# Altium PCB DriveBoard.PcbDoc
Units mil, origin at the board's own origin, x right, y up, seen from the top; angles counter-clockwise.
Board outline 3346.46 x 3346.46 mil, 2 copper layers (Top Layer, Bottom Layer), stack 65.792 mil thick; 84 components, 55 nets, 212 pads, 599 vias.
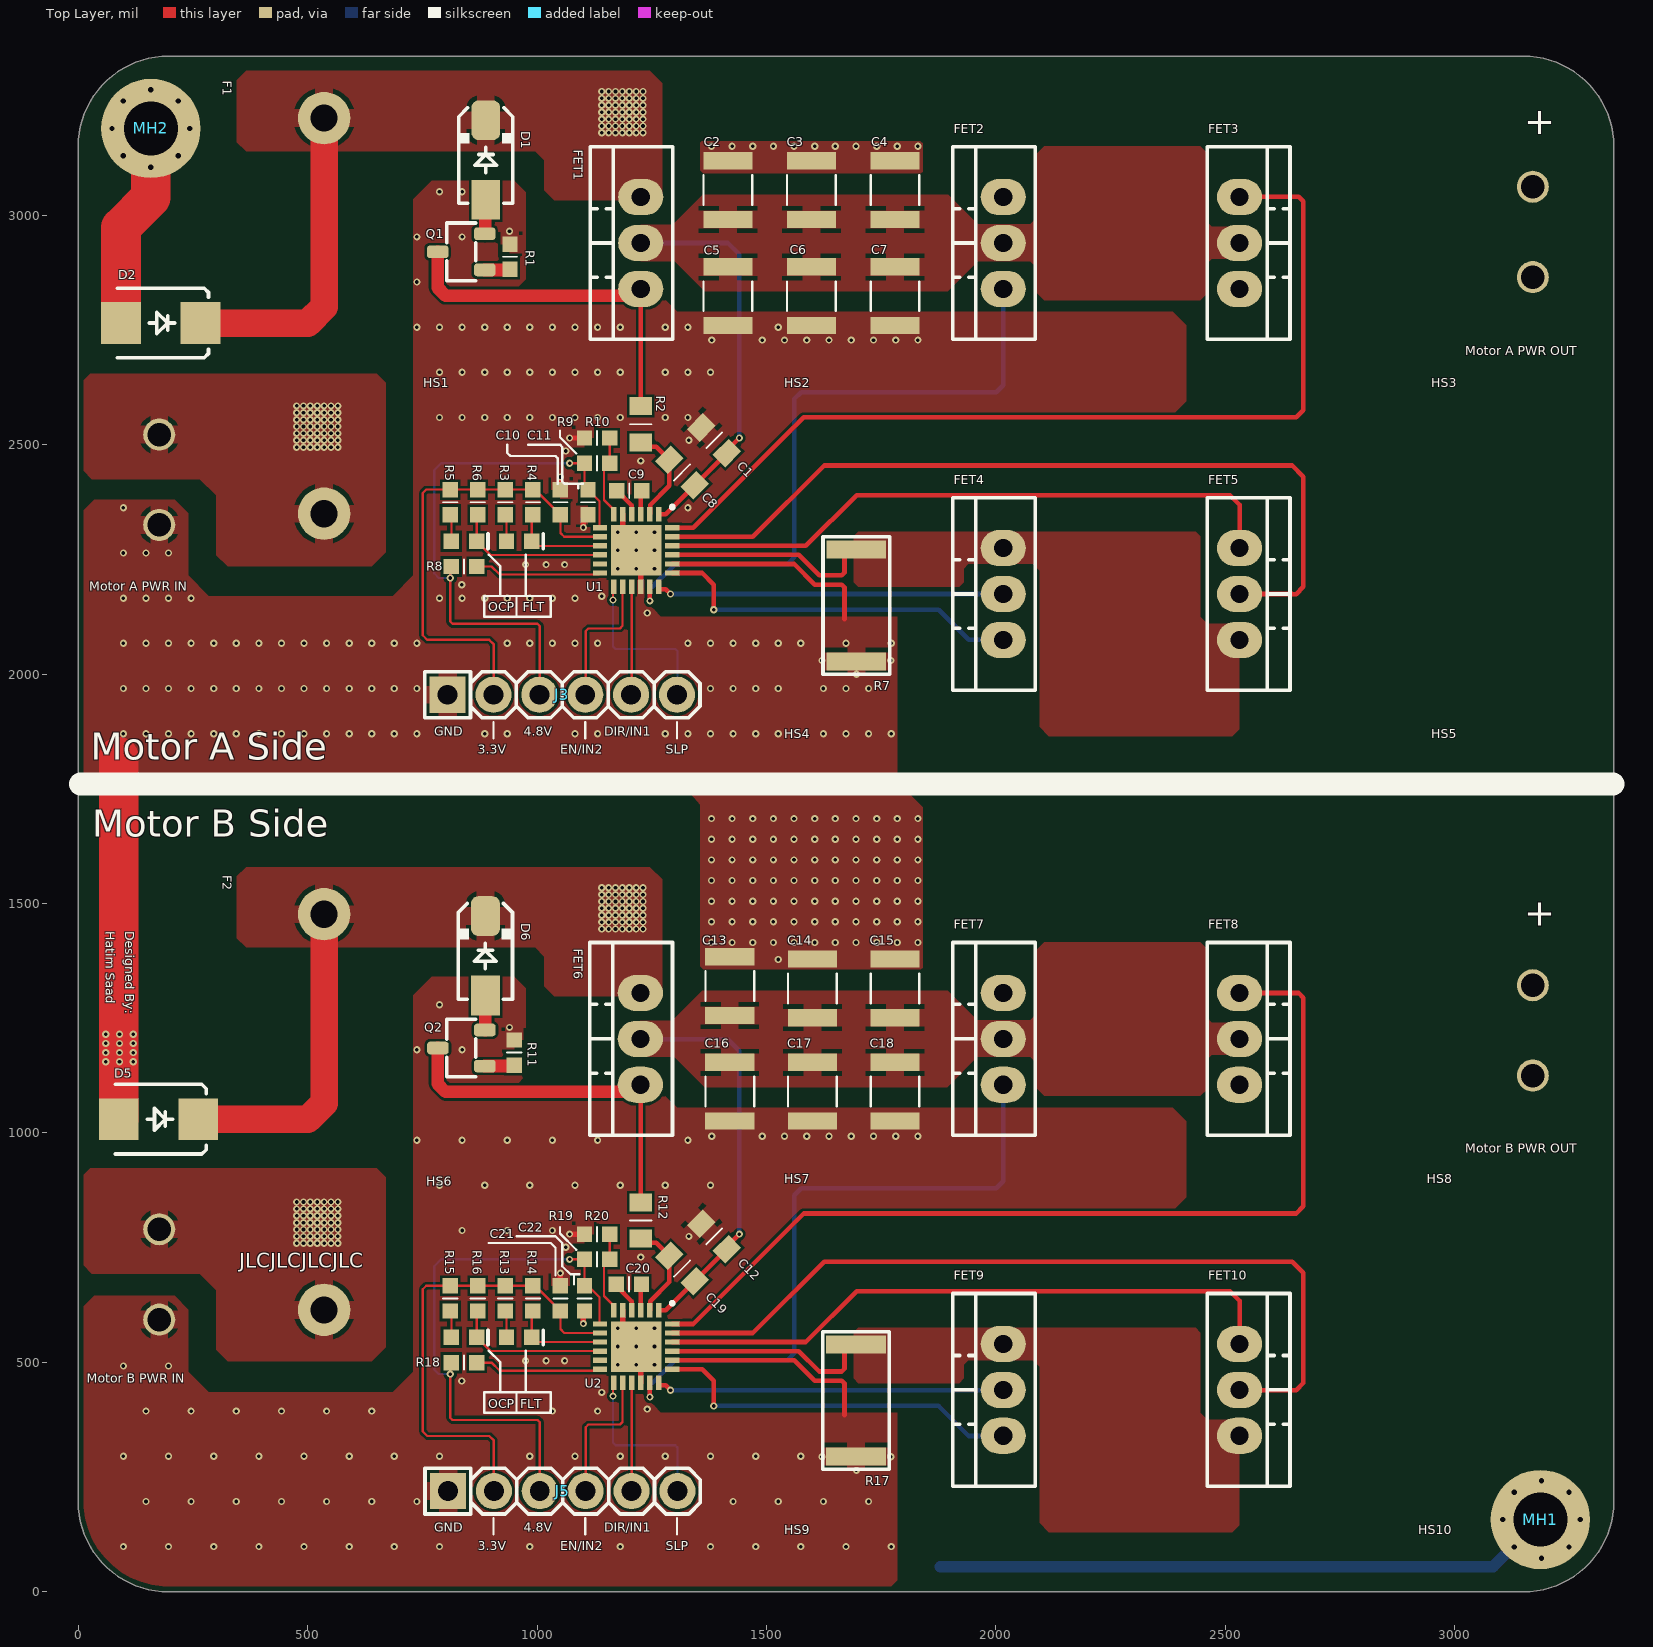
[diagram p0: Top Layer view]
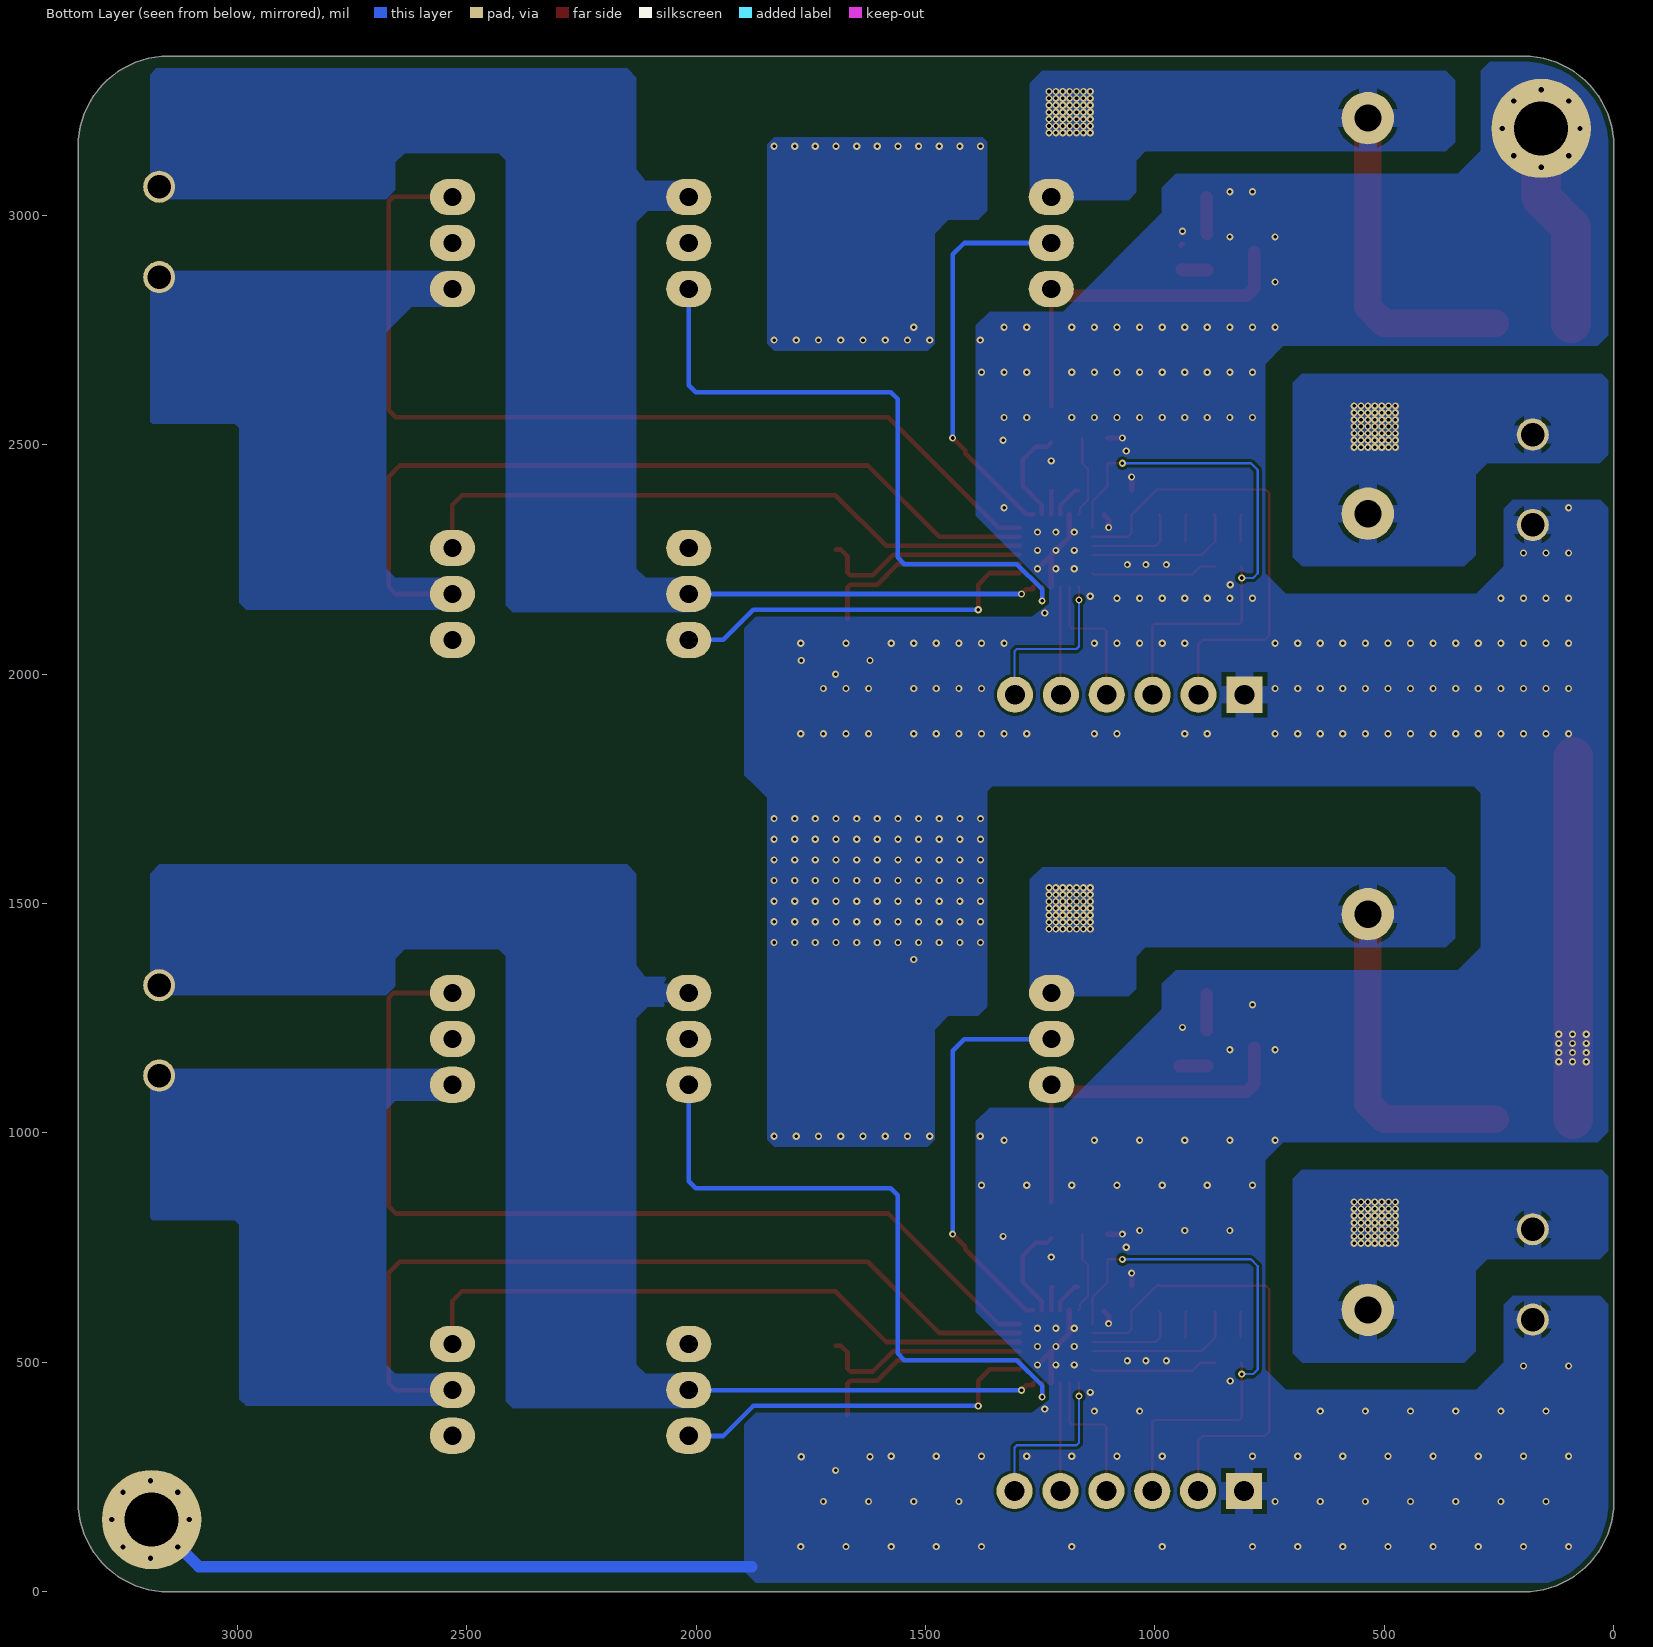
[diagram p1: Bottom Layer view, seen from below]
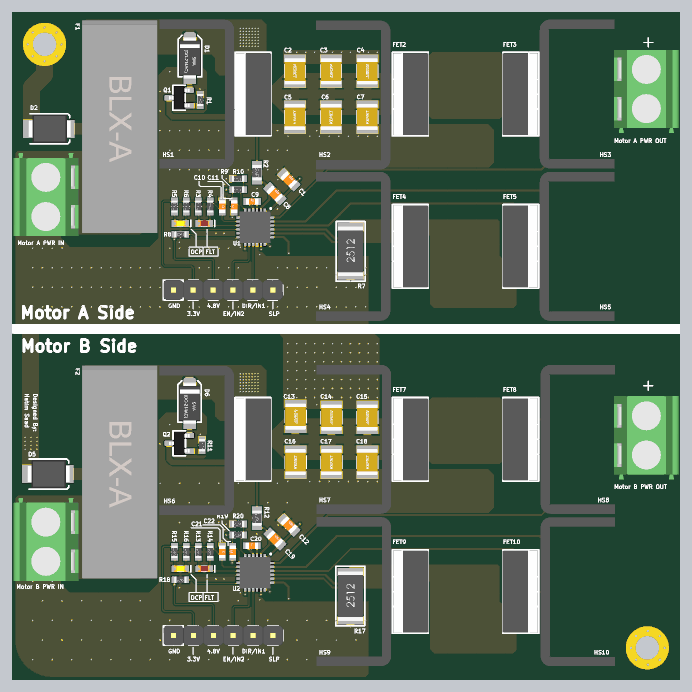
[diagram p2: 3D render of the assembled board from above, using the file's embedded part models]

## Layer stack, top to bottom
Top Solder: solder mask 0.7937, Solder Resist, Dk 3.5
Top Layer: signal copper 1.4
Dielectric 1: dielectric 62.9921, FR-4, Dk 4.8
Bottom Layer: signal copper 1.4
Bottom Solder: solder mask 0.7937, Solder Resist, Dk 3.5

## Board outline
0,196.85 0,3149.61 cw(c196.85,3149.61) 196.85,3346.46 3149.61,3346.46 cw(c3149.61,3149.61) 3346.46,3149.61 3346.46,196.85 cw(c3149.61,196.85) 3149.61,0 196.85,0 cw(c196.85,196.85)

## Design rules (kind name [scope] priority, off if disabled: settings)
BoardOutlineClearance [All] p1: gap=11.81 ignorepadtopadclearanceinfootprint=FALSE
Clearance [All] p1: gap=11.81 ignorepadtopadclearanceinfootprint=TRUE except(5: Arc-Arc Arc-Track Track-Track SMDPad-SMDPad; 5.98: Arc-SMDPad Arc-THPad Track-SMDPad Track-THPad Poly-Region Poly-Text Poly-Hole; 6: Arc-Poly Track-Poly SMDPad-Poly THPad-Poly Via-Fill Via-Poly Fill-Poly Poly-Poly; 10: Arc-Via Track-Via Via-Via; 19.68: THPad-THPad)
DiffPairsRouting [All] p1: maxlimit=10 minlimit=5 mostfreqgap=10 toplayer_minwidth=5 toplayer_maxwidth=15 toplayer_prefwidth=15 bottomlayer_minwidth=5 bottomlayer_maxwidth=15 bottomlayer_prefwidth=15 maxuncoupledlength=500
FabricationTestpoint [All] p1: side=3 testpointundercomponent=TRUE minsize=40 maxsize=100 preferedsize=60 minholesize=0 maxholesize=40 preferedholesize=32 testpointgrid=1 allowsidetop=TRUE allowsidebottom=TRUE usegrid=TRUE gridtolerance=0.01 boardedgeclearance=11.81
Height [All] p1: minheight=0 maxheight=1968.5 prefheight=500
HoleSize [All] p1: absolutevalues=TRUE maxlimit=248.03 minlimit=7.87 maxpercent=80.000 minpercent=20.000
PolygonConnect [All] p1: thpad.connectstyle=Relief thpad.reliefconductorwidth=40 thpad.reliefentries=4 thpad.polygonreliefangle="90 Angle" thpad.airgapwidth=10 smdpad.connectstyle=Relief smdpad.reliefconductorwidth=40 smdpad.reliefentries=4 smdpad.polygonreliefangle="90 Angle" smdpad.airgapwidth=10 via.connectstyle=Direct via.reliefconductorwidth=10 via.reliefentries=4 via.polygonreliefangle="90 Angle" via.airgapwidth=10
RoutingVias [All] p1: holewidth=7.87 width=15.75 viastyle="Through Hole" minholewidth=5.91 minwidth=7.87 maxholewidth=23.62 maxwidth=31.5
SolderMaskExpansion [All] p1: expansion=1.97 istentingtop=FALSE useseparateexpansions=TRUE expansionbottom=1.97 istentingbottom=FALSE
SupplyNets "Schematic Supply Nets_4" [InNet('VM_R_')] p1: voltage=0.000
SupplyNets "Schematic Supply Nets_3" [InNet('VM_L')] p2: voltage=0.000
SupplyNets "Schematic Supply Nets_2" [InNet('VB')] p3: voltage=0.000
SupplyNets "Schematic Supply Nets_1" [InNet('GND')] p4: voltage=0.000
SupplyNets "Schematic Supply Nets" [InNet('VA')] p5: voltage=0.000
UnRoutedNet [All] p1: checkbadconnections=TRUE
Width Width_1 [InNet('VA')] p1: maxlimit=590.55 minlimit=5 preferedwidth=400 minimp=50.000000 maximp=50.000000 favimp=50.000000
Width Width_2 [InNet('VB')] p2: maxlimit=590.55 minlimit=5 preferedwidth=400 minimp=50.000000 maximp=50.000000 favimp=50.000000
Width Width_3 [InNet('Vin_L')] p3: maxlimit=590.55 minlimit=5 preferedwidth=400 minimp=50.000000 maximp=50.000000 favimp=50.000000
Width Width_4 [InNet('Vin_R')] p4: maxlimit=590.55 minlimit=5 preferedwidth=400 minimp=50.000000 maximp=50.000000 favimp=50.000000
Width Width_5 [InNet('VL+')] p5: maxlimit=590.55 minlimit=5 preferedwidth=400 minimp=50.000000 maximp=50.000000 favimp=50.000000
Width Width_6 [InNet('VL-')] p6: maxlimit=590.55 minlimit=5 preferedwidth=400 minimp=50.000000 maximp=50.000000 favimp=50.000000
Width Width_9 [InNet('VR+')] p7: maxlimit=590.55 minlimit=5 preferedwidth=400 minimp=50.000000 maximp=50.000000 favimp=50.000000
Width Width_10 [InNet('VR-')] p8: maxlimit=590.55 minlimit=5 preferedwidth=400 minimp=50.000000 maximp=50.000000 favimp=50.000000
Width [All] p9: maxlimit=590.55 minlimit=5 preferedwidth=10
25 further rules are at their usual default settings.

## Classes and differential pairs
component class Main: 3 C1 C2 C3 C4 C5 C6 C7 C8 C9 C10 C11 C12 C13 C14 C15 C16 C17 C18 C19 C20 C21 C22 D1 D2 D5 D6 F1 F2 FET1 FET2 FET3 FET4 FET5 FET6 FET7 FET8 FET9 FET10 FLT FUSE? HS1 HS3 HS4 HS6 J3 J5 MH1 MH2 "Motor A PWR OUT" "Motor B PWR IN" "Motor B PWR OUT" OCP Q1 Q2 R1 R2 R3 R4 R5 R6 R7 R8 R9 R10 R11 R12 R13 R14 R15 R16 R17 R18 R19 R20 U1 U2

## Components (designator, comment, footprint, x,y, rotation, side; value= is the part's Value field where it differs from the comment)
C1 "0.1UF" "CAP: 0805" 1385.87,2509.45 r315 top
C2 "10UF" "CAP: 1210" 1780,2823.43 r90 top
C3 "10UF" "CAP: 1210" 1415.87,3054.45 r270 top
C4 "10UF" "CAP: 1210" 1597.94,3054.45 r270 top
C5 "10UF" "CAP: 1210" 1415.87,2823.43 r90 top
C6 "10UF" "CAP: 1210" 1597.94,2823.43 r90 top
C7 "10UF" "CAP: 1210" 1780,3054.45 r270 top
C8 "1UF" "CAP: 0805" 1315.87,2439.45 r315 top
C9 "0.1UF" "CAP: 0603" 1200.87,2399.45 r0 top
C10 "1UF" "CAP: 0603" 1050.87,2374.45 r270 top
C11 "1UF" "CAP: 0603" 1110.87,2374.45 r90 top
C12 "0.1UF" "CAP: 0805" 1385.87,774.45 r315 top
C13 "10UF" "CAP: 1210" 1420,1320 r270 top
C14 "10UF" "CAP: 1210" 1600,1315 r270 top
C15 "10UF" "CAP: 1210" 1780,1315 r270 top
C16 "10UF" "CAP: 1210" 1420,1090 r90 top
C17 "10UF" "CAP: 1210" 1600,1090 r90 top
C18 "10UF" "CAP: 1210" 1780,1090 r90 top
C19 "1UF" "CAP: 0805" 1315.87,704.45 r315 top
C20 "0.1UF" "CAP: 0603" 1200,670 r0 top
C21 "1UF" "CAP: 0603" 1050.87,639.45 r270 top
C22 "1UF" "CAP: 0603" 1103.31,639.45 r90 top
D1 "CDBA3100-HF" "DIODE SMA" 885.87,3114.45 r90 top
D2 "SMBJ36A" DO-214AA 180,2765 r180 top
D5 "SMBJ36A" DO-214AA 175,1030 r180 top
D6 "CDBA3100-HF" "DIODE SMA" 885,1380 r90 top
F1 "FUSE 5x20 Holder" "FUSE: 5X20 HOLDER" 535.87,2780.55 r90 top
F2 "FUSE 5x20 Holder" "FUSE: 5x20 Holder" 535.87,1045.55 r90 top
FET1 "STP75NF75" TO220-3 1120.87,2939.45 r90 top
FET2 "STP75NF75" TO220-3 1910.87,2939.45 r90 top
FET3 "STP75NF75" TO220-3 2635.87,2939.45 r270 top
FET4 "STP75NF75" TO220-3 1910.87,2174.45 r90 top
FET5 "STP75NF75" TO220-3 2635.87,2174.45 r270 top
FET6 "STP75NF75" TO220-3 1120,1205 r90 top
FET7 "STP75NF75" TO220-3 1910.87,1205 r90 top
FET8 "STP75NF75" TO220-3 2635.87,1205 r270 top
FET9 "STP75NF75" TO220-3 1910.87,440 r90 top
FET10 "STP75NF75" TO220-3 2635.87,440 r270 top
FLT "RED" "LED: 0603R" 960.87,554.45 r180 top (schematic designator D8)
FLT "RED" "LED: 0603R" 960.87,2289.45 r180 top (schematic designator D4)
HS1 "HSS-B20-NP-06" HSS-B20-NP-06 1110.87,2939.45 r270 top (schematic designator HS3)
HS2 "HSS-B20-NP-06" HSS-B20-NP-06 1895.87,2934.45 r270 top (schematic designator HS9)
HS3 "HSS-B20-NP-06" HSS-B20-NP-06 2645.87,2174.45 r90 top (schematic designator HS4)
HS4 "HSS-B20-NP-06" HSS-B20-NP-06 1895.87,2174.45 r270 top (schematic designator HS10)
HS5 "HSS-B20-NP-06" HSS-B20-NP-06 2645.87,2939.45 r90 top (schematic designator HS1)
HS6 "HSS-B20-NP-06" HSS-B20-NP-06 1110,1200 r270 top
HS7 "HSS-B20-NP-06" HSS-B20-NP-06 1900,1205 r270 top
HS8 "HSS-B20-NP-06" HSS-B20-NP-06 2650,1205 r90 top
HS9 "HSS-B20-NP-06" HSS-B20-NP-06 1900,440 r270 top (schematic designator HS5)
HS10 "HSS-B20-NP-06" HSS-B20-NP-06 2650,439.14 r90 top (schematic designator HS2)
J3 "CONN 6_HF" "CON: PLS-6" 1055,1955 r0 top
J5 "CONN 6_HF" "CON: PLS-6" 1055.87,219.45 r0 top
MH1 "M3" "M3 Mounting Hole"#1 3188.98,157.48 r0 top
MH2 "M3" "M3 Mounting Hole"#2 158.35,3188.98 r0 top
"Motor A PWR IN" "2POS" "CONN2_710002_WRE - duplicate" 176.5,2521.85 r270 top (schematic designator J1)
"Motor A PWR OUT" "2POS" "CONN2_710002_WRE - duplicate" 3170,2865 r90 top (schematic designator J2)
"Motor B PWR IN" "2POS" "CONN2_710002_WRE - duplicate" 176.5,790 r270 top (schematic designator J4)
"Motor B PWR OUT" "2POS" "CONN2_710002_WRE - duplicate" 3170,1125 r90 top (schematic designator J6)
OCP "YELLOW" "LED: 0603Y" 840.87,554.45 r180 top (schematic designator D7)
OCP "YELLOW" "LED: 0603Y" 840.87,2289.45 r180 top (schematic designator D3)
Q1 "BC846B-7-F" SOT23_3 834.69,2920.08 r180 top
Q2 "BC846B-7-F" SOT23_3 835,1185 r180 top
R1 "43K" "RES: 0603" 940.87,2909.45 r270 top
R2 "10K" "RES: 0805" 1225.87,2544.45 r90 top
R3 "10K" "RES: 0603" 930.87,2374.45 r90 top
R4 "10K" "RES: 0603" 990.87,2374.45 r90 top
R5 "10K" "RES: 0603" 810.87,2374.45 r90 top
R6 "10K" "RES: 0603" 870.87,2374.45 r90 top
R7 "15mOhm" "RES: 2512" 1695.87,2149.45 r90 top
R8 "68K" "RES: 0603" 840.87,2234.45 r180 top
R9 "2K" "RES: 0603" 1130.87,2459.45 r180 top
R10 "3.3K" "RES: 0603" 1130.87,2514.45 r180 top
R11 "43K" "RES: 0603" 950,1175 r270 top
R12 "10K" "RES: 0805" 1225.87,809.45 r90 top
R13 "10K" "RES: 0603" 930.87,639.45 r90 top
R14 "10K" "RES: 0603" 990.87,639.45 r90 top
R15 "10K" "RES: 0603" 810.87,639.45 r90 top
R16 "10K" "RES: 0603" 870.87,639.45 r90 top
R17 "15mOhm" "RES: 2512" 1695,417.05 r90 top
R18 "68K" "RES: 0603" 840.87,499.45 r180 top
R19 "2K" "RES: 0603" 1130.87,724.45 r180 top
R20 "3.3K" "RES: 0603" 1130.87,779.45 r180 top
U1 "DRV8701PRGER" VQFN-24 1215.87,2269.45 r270 top
U2 "DRV8701PRGER" VQFN-24 1215.87,534.45 r270 top

## Footprints (in the part's own frame and the unit in brackets; to place one, negate y for a bottom-side part, rotate by r counter-clockwise, add the part's x,y. Pads: shape width x height; smd on the part's side, far side on the other; paste and mask are expansions set on the pad)
"CAP: 0603" [mm]
  rect 0.85x0.85 smd: 1(-0.7,0) 2(0.7,0)
  silkscreen extent 0,-0.4 0,0.4, body extent -0.8,-0.4 0.8,0.4, height 0.3
"CAP: 0805" [mm]
  rect 1x1.25 smd: 1(-1,0) 2(1,0)
  silkscreen extent 0,-0.62 0,0.63, body extent -1,-0.62 1,0.63, height 0.78
"CAP: 1210" [mm]
  rect 0.96x2.72 smd: 1(-1.625,0) 2(1.625,0)
  silkscreen extent -0.82,-1.35 0.82,1.35, body extent -1.67,-1.35 1.73,1.35, height 2.09
"CON: PLS-6" [mm]
  rect 2x2 hole 1.1: 1(-6.35,0)
  round 2 hole 1.1: 2(-3.81,0) 3(-1.27,0) 4(1.27,0) 5(3.81,0) 6(6.35,0)
  silkscreen extent -7.62,-1.27 7.62,1.27, body extent -7.62,-1.27 7.62,1.27, height 8.54
"CONN2_710002_WRE - duplicate" [mil]
  round 70 hole 51 paste-99999 mask+0: 1(0,0) 2(196.85,0)
  body extent -121,-175 296,152, height 394
"DIODE SMA" [mm]
  rect 2.2x1.6 smd: 1(-2.05,-0.06)
  rrect50% 2.2x1.6 smd: 2(2.35,-0.06)
  silkscreen extent -2.25,-1.56 3.05,1.44, body extent -2.6,-1.46 2.9,1.34, height 2.6
DO-214AA [mm]
  rect 2.2x2.3 smd: 1(2.2,0) 2(-2.2,0)
  silkscreen extent -2.64,-1.93 2.4,1.93, body extent -2.8,-1.81 2.6,1.81, height 2.66
"FUSE: 5X20 HOLDER" [mm]
  round 2.9 hole 1.5: 1(-10.95,0) 2(10.95,0)
  body extent -13.7,-4.8 13.48,4.8, height 13.07
"FUSE: 5x20 Holder" [mm]
  round 2.9 hole 1.5: 1(-10.95,0) 2(10.95,0)
  body extent -13.7,-4.8 13.48,4.8, height 13.07
HSS-B20-NP-06 [mil] "Heat Sinks 19 x 19 x 9.52mm TO-220 bolt on"
  body extent -374,-375 374,0, height 870
"LED: 0603R" [mm]
  rect 0.85x0.85 smd: 1(-0.7,0) 2(0.7,0)
  silkscreen extent -1.33,-0.4 -1.33,0.4, body extent -0.8,-0.4 0.8,0.4, height 0.6
"LED: 0603Y" [mm]
  rect 0.85x0.85 smd: 1(-0.7,0) 2(0.7,0)
  silkscreen extent -1.33,-0.4 -1.33,0.4, body extent -0.8,-0.4 0.8,0.4, height 0.6
"M3 Mounting Hole"#1 [mm]
  round 5.5 hole 3 mask+0: 1(-0.064,0)
"M3 Mounting Hole"#2 [mm]
  round 5.5 hole 3 paste-2539.97 mask+0: 1(0,0)
"RES: 0603" [mm]
  rect 0.85x0.85 smd: 1(-0.7,0) 2(0.7,0)
  silkscreen extent 0,-0.4 0,0.4, body extent -0.8,-0.4 0.8,0.4, height 0.44
"RES: 0805" [mm]
  rect 1x1.25 smd: 1(-1,0) 2(1,0)
  silkscreen extent 0,-0.6 0,0.6, body extent -1,-0.6 1,0.6, height 0.44
"RES: 2512" [mm]
  rect 1x3.3 smd: 1(-3.1,0) 2(3.1,0)
  silkscreen extent -3.8,-1.85 3.8,1.85, body extent -3.18,-1.6 3.17,1.6, height 0.52
SOT23_3 [mm]
  rrect50% 1.2x0.7 smd mask+0.1: 1(-1.3,1) 2(-1.3,-1) 3(1.3,0)
  silkscreen extent -0.8,-1.6 0.8,1.6, body extent -1.32,-1.5 1.32,1.5, height 1.08
TO220-3 [mm] "TO-220 3 LEAD, TO-262, pitch: 2.54mm  10x4.5mm"
  oval 2x2.5 hole 1: 1(-2.54,-2.667) 2(0,-2.667) 3(2.54,-2.667)
  silkscreen extent -5.33,-4.44 5.33,0.13, body extent -5.2,-4.5 5.2,0, height 19
VQFN-24 [mm]
  rect 0.8x0.3 smd mask+0.076: 1(-2,1.25) 2(-2,0.75) 3(-2,0.25) 4(-2,-0.25) 5(-2,-0.75) 6(-2,-1.25) 13(2,-1.25) 14(2,-0.75) 15(2,-0.25) 16(2,0.25) 17(2,0.75) 18(2,1.25)
  rect 0.3x0.8 smd mask+0.076: 7(-1.25,-2) 8(-0.75,-2) 9(-0.25,-2) 10(0.25,-2) 11(0.75,-2) 12(1.25,-2) 19(1.25,2) 20(0.75,2) 21(0.25,2) 22(-0.25,2) 23(-0.75,2) 24(-1.25,2)
  rect 2.8x2.8 smd mask+0.076: 25(0,0)
  silkscreen extent -2.49,1.91 -2.31,2.09, body extent -2.05,-2.05 2.05,2.05, height 1

## Part data
C1 C8 C12 C19: library part "CAP 0805", "CAP SMD 0805"
C2 C3 C4 C5 C6 C7 C13 C14 C15 C16 C17 C18: library part "CAP 1210", "CAP SMD 1210"
C9 C10 C11 C20 C21 C22: library part "CAP 0603", "CAP SMD 0603"
D1 D6: library part 641-1747-1-ND, "Diode Schottky 100V 3A (DC) Surface Mount DO-214AC (SMA)", Supplier Part Number 1=750-CDBA3100-HF, Supplier 1=Mouser
D2 D5: "ESD Protection Diodes / TVS Diodes 36volts 5uA 10.3 Amps Uni-Dir", Supplier Part Number 1=652-SMBJ36A, Supplier 1=Mouser
F1 F2: "FUSE: 5x20 Holder"
FET1 FET2 FET3 FET4 FET5 FET6 FET7 FET8 FET9 FET10: "MOSFETs N-Ch 75 Volt 80 Amp", Supplier Part Number 1=511-STP75NF75, Supplier 1=Mouser
FLT FLT: library part "LED RED 0603", "LED RED CLEAR 0603 SMD"
HS1 HS2 HS3 HS4 HS5 HS6 HS7 HS8 HS9 HS10: "Heat Sinks 19 x 19 x 9.52mm TO-220 bolt on", Supplier Part Number 1=490-HSS-B20-NP-06, Supplier 1=Mouser
MH1 MH2: library part "Mounting Hole M3", "Mounting Hole M3 Screw"
"Motor A PWR IN" "Motor A PWR OUT" "Motor B PWR IN" "Motor B PWR OUT": library part 691213710002, "TERM BLK 2POS SIDE ENTRY 5MM PCB", Mfr_Name="Wurth Electronics", Supplier Part Number 1=710-691213710002, RefDes=RefDes, Supplier 1=Mouser, Type=Type
OCP OCP: library part "LED YELLOW 0603", "LED YELLOW CLEAR 0603 SMD"
Q1 Q2: library part BC846B-FDICT-ND, "Bipolar (BJT) Transistor NPN 65V 100mA 300MHz 300mW Surface Mount SOT-23-3", Supplier Part Number 1=621-BC846B-7-F, Supplier 1=Mouser
R1 R3 R4 R5 R6 R8 R9 R10 R11 R13 R14 R15 R16 R18 R19 R20: library part "RES 0603", "RES SMD 0603"
R2 R12: library part "RES 0805", "RES SMD 0805"
R7 R17: library part CSNL2512FT15L0, "Current Sense Resistors - SMD 0.015Ohms 2512 3W 50ppm 1% Metal Plate", Supplier Part Number 1=708-CSNL2512FT15L0, Supplier 1=Mouser
U1 U2: "Motor/Motion/Ignition Controllers & Drivers 47-V H-bridge smart gate driver 24-VQFN", Supplier Part Number 1=595-DRV8701PRGER, Supplier 1=Mouser

## Via types
v1: diameter 15.75, hole 7.87, Top Layer to Bottom Layer, tented both sides, 583 vias
v2: diameter 23.62, hole 11.81, Top Layer to Bottom Layer, 16 vias

## Nets (pads, with @x,y where several pads share a name; then routed paths per layer and width w, separated by ;. In a path a pad name is that pad's centre, name@x,y a point inside that pad or via, vN(x,y) a via of type N, cw(c..) or ccw(c..) an arc to the next point about the centre after c; other vN are vias at no path point)
AVDD_L: C11.2 J3.3 R8.2 R9.2 U1.7 | length 1222.7
  Top Layer w5: R8.2 810.87,2232.01 810.87,2114.45 815.87,2109.45 1000.87,2109.45 1005.87,2104.45 J3.3@1005.87,1954.45 ; v1(1070.87,2459.45) R9.2 1103.31,2409.57 C11.2 1136.09,2376.79 1136.09,2319.7 U1.7
  Bottom Layer w5: v1(810.87,2209.45) 785.87,2209.45 775.87,2219.45 775.87,2444.45 790.87,2459.45 v1(1070.87,2459.45)
AVDD_R: C22.2 J5.3 R18.2 R19.2 U2.7 | length 1222.7
  Top Layer w5: R18.2 810.87,497.01 810.87,379.45 815.87,374.45 1000.87,374.45 1005.87,369.45 J5.3 ; v1(1070.87,724.45) R19.2 1103.31,674.57 1110.87,667.01 1136.09,641.79 1136.09,584.7 U2.7
  Bottom Layer w5: v1(810.87,474.45) 785.87,474.45 775.87,484.45 775.87,709.45 790.87,724.45 v1(1070.87,724.45)
CPH_L: C9.2 U1.3 | length 52.2
  Top Layer w10: C9.2@1223.43,2399.45 1225.72,2397.17 U1.3
CPH_R: C20.2 U2.3 | length 52.2
  Top Layer w10: C20.2@1223.43,664.45 1225.72,662.17 U2.3
CPL_L: C9.1 U1.4 | length 70.5
  Top Layer w10: C9.1@1168.31,2399.45 1174.43,2399.45 1205.87,2368.01 1205.87,2348.35 U1.4
CPL_R: C20.1 U2.4 | length 70.5
  Top Layer w10: C20.1@1168.31,664.45 1174.43,664.45 1205.87,633.01 1205.87,613.35 U2.4
DIR_L/IN1_L: J3.5 U1.15 | length 236.3
  Top Layer w5: J3.5@1205.87,1954.45 1206.03,1954.61 U1.15
DIR_R/IN1_R: J5.5 U2.15 | length 236.3
  Top Layer w5: J5.5 1206.03,219.61 U2.15
DVDD_L: C10.2 J3.2 R3.2 R4.2 R5.2 R6.2 U1.8 | length 1037
  Top Layer w5: J3.2@905.87,1954.45 905.87,2064.45 895.87,2074.45 760.87,2074.45 750.87,2084.45 750.87,2394.45 758.43,2402.01 R5.2 R6.2 R3.2 R4.2 ; R4.2@993.31,2404.45 C10.2 1050.87,2307.56 1059.46,2298.98 U1.8
DVDD_R: C21.2 J5.2 R13.2 R14.2 R15.2 R16.2 U2.8 | length 1037
  Top Layer w5: J5.2 905.87,329.45 895.87,339.45 760.87,339.45 750.87,349.45 750.87,659.45 758.43,667.01 R15.2 R16.2 R13.2 R14.2 ; R14.2@993.31,669.45 C21.2 1050.87,572.56 1059.46,563.98 U2.8
EN_L/IN2_L: J3.4 U1.14 | length 309.9
  Top Layer w5: J3.4@1105.87,1954.45 1105.87,2093.59 1111.73,2099.45 1180.49,2099.45 1186.35,2105.31 U1.14
EN_R/IN2_R: J5.4 U2.14 | length 309.9
  Top Layer w5: J5.4 1105.87,358.59 1111.73,364.45 1180.49,364.45 1186.35,370.31 U2.14
FLT_L: FLT.1@988.43,2289.45 R4.1 U1.9 | length 211.4
  Top Layer w5: R4.1 988.43,2344.45 988.43,2289.45 998.59,2279.29 U1.9
FLT_R: FLT.1@988.43,554.45 R14.1 U2.9 | length 211.4
  Top Layer w5: R14.1 988.43,609.45 988.43,554.45 998.59,544.29 U2.9
GH1_L: FET2.1 U1.17 | length 1422.9
  Top Layer w10: U1.17 1245.4,2159.92 v1(1245.87,2159.45)
  Bottom Layer w10: v1(1245.87,2159.45) 1245.87,2184.45 1300.87,2239.45 1545.87,2239.45 1560.87,2254.45 1560.87,2599.45 1575.87,2614.45 2000.87,2614.45 2015.87,2629.45 FET2.1
GH1_R: FET7.1 U2.17 | length 1422.9
  Top Layer w10: U2.17 1245.4,424.92 v1(1245.87,424.45)
  Bottom Layer w10: v1(1245.87,424.45) 1245.87,449.45 1300.87,504.45 1545.87,504.45 1560.87,519.45 1560.87,864.45 1575.87,879.45 2000.87,879.45 2015.87,894.45 FET7.1@2015.87,1104.45
GH2_L: FET3.1 U1.24 | length 2080.1
  Top Layer w10: U1.24 1340.09,2318.66 1580.87,2559.45 2654.45,2559.45 2670,2575 2670,3030 2660,3040 2531.43,3040 FET3.1
GH2_R: FET8.1 U2.24 | length 2080.1
  Top Layer w10: U2.24 1340.09,583.66 1580.87,824.45 2654.45,824.45 2670,840 2670,1295 2660,1305 2531.43,1305 FET8.1@2530.87,1304.45
GL1_L: FET4.1 U1.19 | length 813.9
  Top Layer w10: U1.19 1359.76,2220.24 1385,2195 v1(1385,2140)
  Bottom Layer w10: v1(1385,2140) 1875,2140 1940.55,2074.45 FET4.1
GL1_R: FET9.1 U2.19 | length 813.9
  Top Layer w10: U2.19 1359.76,485.24 1385,460 v1(1385,405)
  Bottom Layer w10: v1(1385,405) 1875,405 1940.55,339.45 FET9.1@2015.87,339.45
GL2_L: FET5.1 U1.22 | length 1385.4
  Top Layer w10: U1.22 1585.72,2279.29 1696.43,2390 2510,2390 2530.87,2369.13 FET5.1
GL2_R: FET10.1 U2.22 | length 1385.4
  Top Layer w10: U2.22 1585.72,544.29 1696.43,655 2510,655 2530.87,634.13 FET10.1@2530.87,539.45
GND: "Motor A PWR IN.2" "Motor B PWR IN.2" C1.1 C2.1 C3.1 C4.1 C5.1 C6.1 C7.1 C10.1 C11.1 C12.1 C13.1 C14.1 C15.1 C16.1 C17.1 C18.1 C21.1 C22.1 D2.1 D5.1 J3.1 J5.1 MH1.1 MH2.1 R1.1 R7.1 R10.2 R11.1 R17.1 R20.2 U1.5 U1.16 U1.20 U1.25 U2.5 U2.16 U2.20 U2.25 | length 4112
  Top Layer w10: U2.20 1560.08,504.92 1605,460 1664.14,460 1670,454.14 1670,385 ; U1.20 1560.08,2239.92 1605,2195 1664.14,2195 1670,2189.14 1670,2120
  Top Layer w11.81: R1.1 R1.1@943.43,2934.45 ; C21.1 v1(1050.87,694.45) ; C10.1 v1(1050.87,2429.45) ; v1(1070.87,779.45) R20.2 ; v1(1070.87,2514.45) R10.2 ; v1(1100.87,584.45) 1100.87,601.89 C22.1@1110.87,611.89 ; v1(1100.87,2319.45) 1100.87,2336.89 C11.1 ; U2.5 1186.35,563.98 v1(1215.87,534.45) U2.25@1225.72,524.61 ; U1.5 1186.35,2298.98 v1(1215.87,2269.45) U1.25@1225.72,2259.61 ; U2.16 U2.25@1225.72,524.61 ; U1.16 U1.25@1225.72,2259.61 ; U2.25@1245.4,504.92 U2.25@1225.72,524.61 ; U1.25@1245.4,2239.92 U1.25@1225.72,2259.61
  Top Layer w86.61: D5.1 88.39,1175 88.39,1771.65 88.39,1820 ; D2.1 93.39,2973.39 158.35,3038.35 v2(158.35,3104.33) MH2.1
  Bottom Layer w25: 1878.72,55 3083.98,55 MH1.1
  other v1: 98.43,98.43 196.85,98.43 295.28,98.43 393.7,98.43 492.13,98.43 590.55,98.43 688.98,98.43 787.4,98.43 984.25,98.43 1181.1,98.43 1377.95,98.43 1476.38,98.43 1574.8,98.43 1673.23,98.43 1771.65,98.43 147.64,196.85 246.06,196.85 344.49,196.85 442.91,196.85 541.34,196.85 639.76,196.85 738.19,196.85 1427.17,196.85 1525.59,196.85 1624.02,196.85 1722.44,196.85 1695.87,264.45 1620.87,294.45 1770.87,294.45 98.43,295.28 196.85,295.28 295.28,295.28 393.7,295.28 492.13,295.28 590.55,295.28 688.98,295.28 787.4,295.28 984.25,295.28 1082.68,295.28 1181.1,295.28 1279.53,295.28 1377.95,295.28 1476.38,295.28 1574.8,295.28 147.64,393.7 246.06,393.7 344.49,393.7 442.91,393.7 541.34,393.7 639.76,393.7 1033.46,393.7 1131.89,393.7 1239.94,398.07 1140.87,434.45 835.87,459.45 98.43,492.13 196.85,492.13 1175.87,494.45 1215.87,494.45 1255.87,494.45 975,503.61 1019.7,503.61 1060,503.61 1175.87,534.45 1255.87,534.45 1175.87,574.45 1215.87,574.45 1255.87,574.45 1225.87,729.45 1062.53,751.08 1330.87,774.45 836.61,787.4 935.04,787.4 1033.46,787.4 787.4,885.83 885.83,885.83 984.25,885.83 1082.68,885.83 1181.1,885.83 1279.53,885.83 1377.95,885.83 738.19,984.25 836.61,984.25 935.04,984.25 1033.46,984.25 1131.89,984.25 1328.74,984.25 1380.87,992.87 1490.87,992.87 1539.32,992.87 1587.77,992.87 1636.21,992.87 1684.66,992.87 1733.11,992.87 1781.55,992.87 1830,992.87 60,1155 90,1155 120,1155 60,1175 90,1175 120,1175 738.19,1181.1 836.61,1181.1 60,1195 90,1195 120,1195 60,1215 90,1215 120,1215 940,1230 787.4,1279.53 1525.59,1377.95 1380,1415 1425,1415 1470,1415 1515,1415 1560,1415 1605,1415 1650,1415 1695,1415 1740,1415 1785,1415 1830,1415 1380,1460 1425,1460 1470,1460 1515,1460 1560,1460 1605,1460 1650,1460 1695,1460 1740,1460 1785,1460 1830,1460 1380,1505 1425,1505 1470,1505 1515,1505 1560,1505 1605,1505 1650,1505 1695,1505 1740,1505 1785,1505 1830,1505 1380,1550 1425,1550 1470,1550 1515,1550 1560,1550 1605,1550 1650,1550 1695,1550 1740,1550 1785,1550 1830,1550 1380,1595 1425,1595 1470,1595 1515,1595 1560,1595 1605,1595 1650,1595 1695,1595 1740,1595 1785,1595 1830,1595 1380,1640 1425,1640 1470,1640 1515,1640 1560,1640 1605,1640 1650,1640 1695,1640 1740,1640 1785,1640 1830,1640 1380,1685 1425,1685 1470,1685 1515,1685 1560,1685 1605,1685 1650,1685 1695,1685 1740,1685 1785,1685 1830,1685 98.43,1870.08 147.64,1870.08 196.85,1870.08 246.06,1870.08 295.28,1870.08 344.49,1870.08 393.7,1870.08 442.91,1870.08 492.13,1870.08 541.34,1870.08 590.55,1870.08 639.76,1870.08 688.98,1870.08 738.19,1870.08 885.83,1870.08 935.04,1870.08 1082.68,1870.08 1131.89,1870.08 1279.53,1870.08 1328.74,1870.08 1377.95,1870.08 1427.17,1870.08 1476.38,1870.08 1525.59,1870.08 1624.02,1870.08 1673.23,1870.08 1722.44,1870.08 1771.65,1870.08 98.43,1968.5 147.64,1968.5 196.85,1968.5 246.06,1968.5 295.28,1968.5 344.49,1968.5 393.7,1968.5 442.91,1968.5 492.13,1968.5 541.34,1968.5 590.55,1968.5 639.76,1968.5 688.98,1968.5 738.19,1968.5 1377.95,1968.5 1427.17,1968.5 1476.38,1968.5 1525.59,1968.5 1624.02,1968.5 1673.23,1968.5 1722.44,1968.5 1695.87,1999.45 1620.87,2029.45 1770.87,2029.45 98.43,2066.93 147.64,2066.93 196.85,2066.93 246.06,2066.93 295.28,2066.93 344.49,2066.93 393.7,2066.93 442.91,2066.93 492.13,2066.93 541.34,2066.93 590.55,2066.93 639.76,2066.93 688.98,2066.93 738.19,2066.93 935.04,2066.93 984.25,2066.93 1033.46,2066.93 1082.68,2066.93 1131.89,2066.93 1328.74,2066.93 1377.95,2066.93 1427.17,2066.93 1476.38,2066.93 1525.59,2066.93 1574.8,2066.93 1673.23,2066.93 1771.65,2066.93 1239.94,2133.07 98.43,2165.35 147.64,2165.35 196.85,2165.35 246.06,2165.35 787.4,2165.35 836.61,2165.35 885.83,2165.35 935.04,2165.35 984.25,2165.35 1033.46,2165.35 1082.68,2165.35 1140.87,2169.45 835.87,2194.45 1175.87,2229.45 1215.87,2229.45 1255.87,2229.45 975,2238.61 1019.7,2238.61 1060,2238.61 98.43,2263.78 147.64,2263.78 196.85,2263.78 1175.87,2269.45 1255.87,2269.45 1175.87,2309.45 1215.87,2309.45 1255.87,2309.45 98.43,2362.2 1328.74,2362.2 1225.87,2464.45 1062.53,2486.08 1330.87,2509.45 787.4,2559.06 836.61,2559.06 885.83,2559.06 935.04,2559.06 984.25,2559.06 1033.46,2559.06 1082.68,2559.06 1131.89,2559.06 1181.1,2559.06 1279.53,2559.06 1328.74,2559.06 787.4,2657.48 836.61,2657.48 885.83,2657.48 935.04,2657.48 984.25,2657.48 1033.46,2657.48 1082.68,2657.48 1131.89,2657.48 1181.1,2657.48 1279.53,2657.48 1328.74,2657.48 1377.95,2657.48 1380.87,2727.87 1490.87,2727.87 1539.32,2727.87 1587.77,2727.87 1636.21,2727.87 1684.66,2727.87 1733.11,2727.87 1781.55,2727.87 1830,2727.87 738.19,2755.91 787.4,2755.91 836.61,2755.91 885.83,2755.91 935.04,2755.91 984.25,2755.91 1033.46,2755.91 1082.68,2755.91 1131.89,2755.91 1181.1,2755.91 1279.53,2755.91 1328.74,2755.91 1525.59,2755.91 738.19,2854.33 738.19,2952.76 836.61,2952.76 940,2965 787.4,3051.18 836.61,3051.18 1380,3150 1425,3150 1470,3150 1515,3150 1560,3150 1605,3150 1650,3150 1695,3150 1740,3150 1785,3150 1830,3150
  other v2: 3188.98,72.83 3129.13,97.62 3248.83,97.62 3104.33,157.48 3273.62,157.48 3129.13,217.34 3248.83,217.34 3188.98,242.13 98.5,3129.12 218.2,3129.12 73.71,3188.98 243,3188.98 98.5,3248.83 218.2,3248.83 158.35,3273.62
IDRV_L: R8.1 U1.12 | length 277.4
  Top Layer w5: R8.1 900.87,2234.45 918.46,2216.86 1133.76,2216.86 U1.12
IDRV_R: R18.1 U2.12 | length 277.4
  Top Layer w5: R18.1 900.87,499.45 918.46,481.86 1133.76,481.86 U2.12
NFLT_L: FLT.2@933.31,2289.45 R3.1 | length 58.5
  Top Layer w5: R3.1 933.31,2344.45 FLT.2@933.31,2289.45
NFLT_R: FLT.2@933.31,554.45 R13.1 | length 58.5
  Top Layer w5: R13.1 933.31,609.45 FLT.2@933.31,554.45
OCP_L: OCP.2@813.31,2289.45 R5.1 | length 58.5
  Top Layer w5: R5.1 813.31,2344.45 OCP.2@813.31,2289.45
OCP_R: OCP.2@813.31,554.45 R15.1 | length 58.5
  Top Layer w5: R15.1 813.31,609.45 OCP.2@813.31,554.45
RP_L_B: Q1.1 R1.2 | length 55.5
  Top Layer w27.56: Q1.1 939.69,2880.71 R1.2
RP_L_C: FET1.1 Q1.3 R2.2 | length 799.1
  Top Layer w10: R2.2 FET1.1
  Top Layer w27.56: Q1.3 783.51,2841.81 800.87,2824.45 FET1.1@1197.6,2824.45 ; FET1.1@1192.39,2829.66 FET1.1@1197.6,2824.45 ; FET1.1@1205.87,2824.45 FET1.1@1197.6,2824.45 ; FET1.1@1225.87,2824.45 FET1.1@1197.6,2824.45
RP_L_E: D1.1 Q1.2 | length 81
  Top Layer w27.56: Q1.2 887.06,2959.45 887.06,3037.56 D1.1@888.24,3038.74
RP_R_B: Q2.1 R11.2 | length 59.8
  Top Layer w27.56: Q2.1@885.87,1145.71 R11.2@945.71,1145.71
RP_R_C: FET6.1 Q2.3 R12.2 | length 768.5
  Top Layer w10: R12.2 FET6.1@1225.87,1089.45
  Top Layer w27.56: Q2.3@783.51,1185.08 783.51,1106.81 800.87,1089.45 1197.6,1089.45 1205.87,1089.45 FET6.1@1225.87,1089.45
RP_R_E: D6.1 Q2.2 | length 78.1
  Top Layer w27.56: Q2.2@887.06,1224.45 D6.1@887.06,1302.56
SLP_L: J3.6 U1.13 | length 371
  Top Layer w5: v1(1165.55,2161.48) 1165.54,2189.58 U1.13
  Bottom Layer w5: v1(1165.55,2161.48) 1165.55,2059.77 1170.87,2054.45 1300.87,2054.45 1305.87,2049.45 J3.6@1305.87,1954.45
SLP_R: J5.6 U2.13 | length 371
  Top Layer w5: v1(1165.55,426.48) 1165.54,454.58 U2.13
  Bottom Layer w5: v1(1165.55,426.48) 1165.55,324.77 1170.87,319.45 1300.87,319.45 1305.87,314.45 J5.6
SNS_L: OCP.1@868.43,2289.45 R6.1 U1.10 | length 339.5
  Top Layer w5: R6.1 868.43,2344.45 868.43,2289.45 898.28,2259.61 U1.10
SNS_R: OCP.1@868.43,554.45 R16.1 U2.10 | length 339.5
  Top Layer w5: R16.1 868.43,609.45 868.43,554.45 898.28,524.61 U2.10
SP_L: FET4.3 FET5.3 R7.2 U1.21 | length 464.2
  Top Layer w10: U1.21 1570.39,2259.61 1615,2215 1664.14,2215 1670,2220.86 1670,2256.81 1684.69,2271.5 R7.2
SP_R: FET9.3 FET10.3 R17.2 U2.21 | length 464.2
  Top Layer w10: U2.21 1570.39,524.61 1615,480 1664.14,480 1670,485.86 1670,521.81 1684.69,536.5 R17.2@1695.87,536.5
VA: D1.2 D2.2 F1.2 FET1.3 | length 703.1
  Top Layer w60: D2.2@258.84,2765 500.73,2765 535.87,2800.15 F1.2
  other v1: 1140.87,3179.45 1155.87,3179.45 1170.87,3179.45 1185.87,3179.45 1200.87,3179.45 1215.87,3179.45 1230.87,3179.45 1140.87,3194.45 1155.87,3194.45 1170.87,3194.45 1185.87,3194.45 1200.87,3194.45 1215.87,3194.45 1230.87,3194.45 1140.87,3209.45 1155.87,3209.45 1170.87,3209.45 1185.87,3209.45 1200.87,3209.45 1215.87,3209.45 1230.87,3209.45 1140.87,3224.45 1155.87,3224.45 1170.87,3224.45 1185.87,3224.45 1200.87,3224.45 1215.87,3224.45 1230.87,3224.45 1140.87,3239.45 1155.87,3239.45 1170.87,3239.45 1185.87,3239.45 1200.87,3239.45 1215.87,3239.45 1230.87,3239.45 1140.87,3254.45 1155.87,3254.45 1170.87,3254.45 1185.87,3254.45 1200.87,3254.45 1215.87,3254.45 1230.87,3254.45 1140.87,3269.45 1155.87,3269.45 1170.87,3269.45 1185.87,3269.45 1200.87,3269.45 1215.87,3269.45 1230.87,3269.45
VB: D5.2 D6.2 F2.2 FET6.3 | length 703.1
  Top Layer w60: D5.2@258.84,1030 500.73,1030 535.87,1065.15 F2.2
  other v1: 1140.87,1444.45 1155.87,1444.45 1170.87,1444.45 1185.87,1444.45 1185.87,1444.45 1200.87,1444.45 1215.87,1444.45 1230.87,1444.45 1140.87,1459.45 1155.87,1459.45 1170.87,1459.45 1185.87,1459.45 1200.87,1459.45 1215.87,1459.45 1230.87,1459.45 1140.87,1474.45 1155.87,1474.45 1170.87,1474.45 1185.87,1474.45 1200.87,1474.45 1215.87,1474.45 1230.87,1474.45 1140.87,1489.45 1155.87,1489.45 1170.87,1489.45 1185.87,1489.45 1200.87,1489.45 1215.87,1489.45 1230.87,1489.45 1140.87,1504.45 1155.87,1504.45 1170.87,1504.45 1185.87,1504.45 1200.87,1504.45 1215.87,1504.45 1230.87,1504.45 1140.87,1519.45 1155.87,1519.45 1170.87,1519.45 1185.87,1519.45 1200.87,1519.45 1215.87,1519.45 1230.87,1519.45 1140.87,1534.45 1155.87,1534.45 1170.87,1534.45 1185.87,1534.45 1200.87,1534.45 1215.87,1534.45 1230.87,1534.45
VCP_L: C8.1 R2.1 U1.2 | length 214.6
  Top Layer w10: R2.1 1235.25,2495.7 1259.62,2495.7 C8.1 1288.04,2410.05 1246.31,2368.32 1246.31,2349.09 U1.2
VCP_R: C19.1 R12.1 U2.2 | length 214.6
  Top Layer w10: R12.1 1235.25,760.7 1259.62,760.7 C19.1 1288.04,675.05 1246.31,633.32 1246.31,614.09 U2.2
Vin_L: "Motor A PWR IN.1" F1.1
  other v1: 475.87,2494.45 490.87,2494.45 505.87,2494.45 520.87,2494.45 535.87,2494.45 550.87,2494.45 565.87,2494.45 475.87,2509.45 490.87,2509.45 505.87,2509.45 520.87,2509.45 535.87,2509.45 550.87,2509.45 565.87,2509.45 475.87,2524.45 490.87,2524.45 505.87,2524.45 520.87,2524.45 535.87,2524.45 550.87,2524.45 565.87,2524.45 475.87,2539.45 490.87,2539.45 505.87,2539.45 520.87,2539.45 535.87,2539.45 550.87,2539.45 565.87,2539.45 475.87,2554.45 490.87,2554.45 505.87,2554.45 520.87,2554.45 535.87,2554.45 550.87,2554.45 565.87,2554.45 475.87,2569.45 490.87,2569.45 505.87,2569.45 520.87,2569.45 535.87,2569.45 550.87,2569.45 565.87,2569.45 475.87,2584.45 490.87,2584.45 505.87,2584.45 520.87,2584.45 535.87,2584.45 550.87,2584.45 565.87,2584.45
Vin_R: "Motor B PWR IN.1" F2.1
  other v1: 475.87,759.45 490.87,759.45 505.87,759.45 520.87,759.45 535.87,759.45 550.87,759.45 565.87,759.45 475.87,774.45 490.87,774.45 505.87,774.45 520.87,774.45 535.87,774.45 550.87,774.45 565.87,774.45 475.87,789.45 490.87,789.45 505.87,789.45 520.87,789.45 535.87,789.45 550.87,789.45 565.87,789.45 475.87,804.45 490.87,804.45 505.87,804.45 520.87,804.45 535.87,804.45 550.87,804.45 565.87,804.45 475.87,819.45 490.87,819.45 505.87,819.45 520.87,819.45 535.87,819.45 550.87,819.45 565.87,819.45 475.87,834.45 490.87,834.45 505.87,834.45 520.87,834.45 535.87,834.45 550.87,834.45 565.87,834.45 475.87,849.45 490.87,849.45 505.87,849.45 520.87,849.45 535.87,849.45 550.87,849.45 565.87,849.45
VL+: "Motor A PWR OUT.2" FET2.3 FET4.2 U1.18 | length 760.2
  Top Layer w10: U1.18 1265.09,2186.09 1265.99,2185.19 1280.13,2185.19 v1(1290.87,2174.45)
  Bottom Layer w10: v1(1290.87,2174.45) FET4.2
VL-: "Motor A PWR OUT.1" FET3.3 FET5.2 U1.23 | length 1835.7
  Top Layer w10: U1.23 1470.4,2298.98 1625.87,2454.45 2645.55,2454.45 2670,2430 2670,2190 2654.14,2174.14 2645.86,2174.14 2645.55,2174.45 FET5.2
VM_L: C1.2 C2.2 C3.2 C4.2 C5.2 C6.2 C7.2 C8.2 FET1.2 FET2.2 FET3.2 U1.1 | length 873.3
  Top Layer w10: U1.1 1280.29,2348.19 C8.2 C1.2 1413.71,2487.29 v1(1440.87,2514.45)
  Bottom Layer w10: FET1.2 1415.87,2939.45 1440.87,2914.45 v1(1440.87,2514.45)
VM_R_: C12.2 C13.2 C14.2 C15.2 C16.2 C17.2 C18.2 C19.2 FET6.2 FET7.2 FET8.2 U2.1 | length 873.3
  Top Layer w10: U2.1 1280.29,613.19 C19.2 C12.2 1413.71,752.29 v1(1440.87,779.45)
  Bottom Layer w10: FET6.2@1225.87,1204.45 1415.87,1204.45 1440.87,1179.45 v1(1440.87,779.45)
VR+: "Motor B PWR OUT.2" FET7.3 FET9.2 U2.18 | length 760.2
  Top Layer w10: U2.18 1265.09,451.09 1265.99,450.19 1280.13,450.19 v1(1290.87,439.45)
  Bottom Layer w10: v1(1290.87,439.45) FET9.2@2015.87,439.45
VR-: "Motor B PWR OUT.1" FET8.3 FET10.2 U2.23 | length 1835.7
  Top Layer w10: U2.23 1470.4,563.98 1625.87,719.45 2645.55,719.45 2670,695 2670,455 2654.14,439.14 2645.86,439.14 2645.55,439.45 FET10.2@2530.87,439.45
Vref_L: R9.1 R10.1 U1.6 | length 180.1
  Top Layer w5: R10.1 R9.1 1145.87,2446.89 1145.87,2379.45 1163.26,2362.07 1163.26,2351.59 U1.6
Vref_R: R19.1 R20.1 U2.6 | length 180.1
  Top Layer w5: R20.1 R19.1 1145.87,711.89 1145.87,644.45 1163.26,627.07 1163.26,616.59 U2.6
pads on no net: U1.11 U2.11

## Polygon pours and split planes (outlines as drawn)
VM_R_ on Top Layer "VM_R__L01_P070" (solid, pour order 70): 1225,1244.26 1294.26,1244.26 1360,1310 1894.68,1310 1959.13,1245.55 2015,1245.55 2015,1165.55 1959.13,1165.55 1893.57,1100 1365,1100 1299.45,1165.55 1225,1165.55
VM_R_ on Top Layer "VM_R__L01_P068" (solid, remove dead copper, pour order 68): 2015.87,1245.55 2075,1245.55 2090,1260.55 2090,1400.55 2105,1415.55 2445,1415.55 2460,1400.55 2460,1250.55 2470,1240.55 2530,1240.55 2530,1170.55 2470,1170.55 2460,1160.55 2460,1095.55 2445,1080.55 2105.32,1080.55 2090,1095.87 2090,1150.55 2075,1165.55 2015.87,1165.55
Vin_R on Top Layer "VIN_R_L01_P067" (solid, pour order 67): 30,693.15 5.87,717.28 5.87,902.6 25.87,922.6 650.55,922.6 670,903.15 670,533.15 639.45,502.6 325.87,502.6 300.87,527.6 300.87,657.28 265,693.15
SP_R on Top Layer "SP_R_L01_P066" (solid, remove dead copper, pour order 66): 2530,375 2460,375 2445,390 2445,565 2435,575 1700,575 1690,565 1690,465 1700,455 1920,455 1930,465 1930,495 1940,505 2080,505 2095,490 2095,150 2115,130 2515,130 2530,145
GND on Top Layer "GND_L01_P060" (solid, pour order 60): 1840,1710 1840,1360 1836.3,1356.3 1362.45,1356.3 1355.87,1362.87 1355.88,1714.99 1304.14,1775 1775,1775
GND on Top Layer "GND_L01_P059" (solid, remove dead copper, pour order 59): 10,620 35,645 210,645 240,615 240,480 285,435 685,435 730,480 730,1300 770,1340 950,1340 975,1315 975,1125 955,1105 1255,1105 1305,1055 2385,1055 2415,1025 2415,860 2379.45,824.45 1589.45,824.45 1345,580 1275,580 1255,560 1255,405 1270,390 1785,390 1785,25 1765,5 40,5 10,35
VB on Top Layer "VB_L01_P055" (solid, remove dead copper, pour order 55): 345.87,1559.45 365.87,1579.45 1245.87,1579.45 1272.99,1552.33 1273,1311.57 1259.31,1297.89 1037.44,1297.89 1015.87,1319.45 1015.87,1384.45 996.14,1404.18 366.14,1404.18 345.87,1424.45
SP_L on Top Layer "SP_L_L01_P049" (solid, remove dead copper, pour order 49): 2530,2110 2460,2110 2445,2125 2445,2300 2435,2310 1700,2310 1690,2300 1690,2200 1700,2190 1920,2190 1930,2200 1930,2230 1940,2240 2080,2240 2095,2225 2095,1885 2115,1865 2515,1865 2530,1880
VM_L on Top Layer "VM_L_L01_P040" (solid, remove dead copper, pour order 40): 2015.87,2980 2075,2980 2090,2995 2090,3135 2105,3150 2445,3150 2460,3135 2460,2985 2470,2975 2530,2975 2530,2905 2470,2905 2460,2895 2460,2830 2445,2815 2105.32,2815 2090,2830.32 2090,2885 2075,2900 2015.87,2900
VM_L on Top Layer "VM_L_L01_P013" (solid, pour order 13): 1225.87,2978.71 1295.13,2978.71 1360.87,3044.45 1895.55,3044.45 1960,2980 2015.87,2980 2015.87,2900 1960,2900 1894.45,2834.45 1365.87,2834.45 1300.32,2900 1225.87,2900
GND on Top Layer "GND_L01_P035" (solid, pour order 35): 1840,3156.84 1840,3095 1836.3,3091.3 1362.45,3091.3 1355.87,3097.87 1355.87,3157.87 1359.3,3161.3 1835.54,3161.3
GND on Top Layer "GND_L01_P032" (solid, remove dead copper, pour order 32): 10,2355 35,2380 210,2380 240,2350 240,2215 285,2170 685,2170 730,2215 730,3035 770,3075 950,3075 975,3050 975,2860 955,2840 1255,2840 1305,2790 2385,2790 2415,2760 2415,2595 2379.45,2559.45 1589.45,2559.45 1345,2315 1275,2315 1255,2295 1255,2140 1270,2125 1785,2125 1785,1760 1765,1740 40,1740 10,1770
VA on Top Layer "VA_L01_P006" (solid, remove dead copper, pour order 6): 345.87,3294.45 365.87,3314.45 1245.87,3314.45 1272.99,3287.33 1273,3046.57 1259.31,3032.89 1037.44,3032.89 1015.87,3054.45 1015.87,3119.45 996.14,3139.18 366.14,3139.18 345.87,3159.45
Vin_L on Top Layer "VIN_L_L01_P001" (solid, pour order 1): 30,2425 5.87,2449.13 5.87,2634.45 25.87,2654.45 650.55,2654.45 670,2635 670,2265 639.45,2234.45 325.87,2234.45 300.87,2259.45 300.87,2389.13 265,2425
GND on Bottom Layer "GND_L02_P058" (solid, remove dead copper, pour order 58): 1365,1745 1335,1775 1890,1775 1845,1730 1845,985 1830,970 1495,970 1480,985 1480,1225 1450,1255 1385,1255 1365,1275
VR+ on Bottom Layer "VR+_L02_P065" (solid, remove dead copper, pour order 65): 2095,1320 2130,1365 2130,1565 2150,1585 3170,1585 3190,1565 3190,1300 2675,1300 2655,1320 2655,1380 2635,1400 2430,1400 2415,1385 2415,1310 2405,1320
VR- on Bottom Layer "VR-_L02_P064" (solid, remove dead copper, pour order 64): 2980,1140 3190,1140 3190,815 3185,810 3005,810 2980,785
VR- on Bottom Layer "VR-_L02_P063" (solid, remove dead copper, pour order 63): 2530,1140 2980,1140 2995,1125 2995,420 2980,405 2535,405 2535,475 2655,475 2675,495 2675,1050 2655,1070 2530,1070
VR+ on Bottom Layer "VR+_L02_P062" (solid, remove dead copper, pour order 62): 2015,1340 2395,1340 2415,1320 2415,415 2400,400 2015,400 2015,475 2110,475 2130,495 2130,1250 2105,1275 2015,1275
GND on Bottom Layer "GND_L02_P057" (solid, remove dead copper, pour order 57): 10,625 30,645 220,645 240,625 240,500 300,440 715,440 760,485 760,940.63 720.63,980 35,980 0,1015 0,1795 35,1830 380,1830 290,1740 290,1405 340,1355 955,1355 985,1325 985,1270 1200,1055 1360,1055 1390,1025 1390,610 1230,450 1230,418.04 1268.19,390 1870,390 1895,365 1895,45 1870,20 55,20 10,65
VB on Bottom Layer "VB_L02_P054" (solid, remove dead copper, pour order 54): 345.87,1559.45 365.87,1579.45 1245.87,1579.45 1272.99,1552.33 1273,1311.57 1259.31,1297.89 1057.44,1297.89 1040.87,1314.45 1040.87,1384.13 1020.82,1404.18 366.14,1404.18 345.87,1424.45
Vin_R on Bottom Layer "VIN_R_L02_P052" (solid, pour order 52): 30.87,724.45 5.87,749.45 5.87,899.45 25.87,919.45 680.55,919.45 700,900 700,520 679.45,499.45 325.87,499.45 300.87,524.45 300.87,699.45 275.87,724.45
VL+ on Bottom Layer "VL+_L02_P048" (solid, remove dead copper, pour order 48): 2095,3055 2130,3100 2130,3300 2150,3320 3176.06,3320 3190,3306.06 3190,3035 2675,3035 2655,3055 2655,3115 2635,3135 2430,3135 2415,3120 2415,3045 2405,3055
VL- on Bottom Layer "VL-_L02_P046" (solid, remove dead copper, pour order 46): 2955,2878.88 3190,2878.88 3190,2550 3185,2545 3005,2545 2955,2495
VL- on Bottom Layer "VL-_L02_P044" (solid, remove dead copper, pour order 44): 2530,2878.77 2976.23,2878.77 2995,2860 2995,2155 2980,2140 2535,2140 2535,2210 2655,2210 2675,2230 2675,2745 2620,2800 2530,2800
VL+ on Bottom Layer "VL+_L02_P042" (solid, remove dead copper, pour order 42): 2015,3075 2395,3075 2415,3055 2415,2150 2400,2135 2015,2135 2015,2210 2110,2210 2130,2230 2130,2985 2105,3010 2015,3010
GND on Bottom Layer "GND_L02_P027" (solid, remove dead copper, pour order 27): 1365,3160 1375,3170 1830,3170 1845,3155 1845,2720 1830,2705 1495,2705 1480,2720 1480,2960 1450,2990 1385,2990 1365,3010
GND on Bottom Layer "GND_L02_P026" (solid, remove dead copper, pour order 26): 10,2360 30,2380 220,2380 240,2360 240,2235 300,2175 715,2175 760,2220 760,2675.63 720.63,2715 35,2715 0,2750 0,3270 75,3345 260,3345 290,3315 290,3140 340,3090 955,3090 985,3060 985,3005 1200,2790 1360,2790 1390,2760 1390,2345 1230,2185 1230,2153.04 1268.19,2125 1870,2125 1895,2100 1895,1780 1870,1755 55,1755 10,1800
VA on Bottom Layer "VA_L02_P002" (solid, remove dead copper, pour order 2): 345.87,3294.45 365.87,3314.45 1245.87,3314.45 1272.99,3287.33 1273,3046.57 1259.31,3032.89 1057.44,3032.89 1040.87,3049.45 1040.87,3119.13 1020.82,3139.18 366.14,3139.18 345.87,3159.45
Vin_L on Bottom Layer "VIN_L_L02_P000" (solid, pour order 0): 30.87,2459.45 5.87,2484.45 5.87,2634.45 25.87,2654.45 680.55,2654.45 700,2635 700,2255 679.45,2234.45 325.87,2234.45 300.87,2259.45 300.87,2434.45 275.87,2459.45

## Silkscreen, mask and mechanical layers (free items; w line width, h text height)
Top Overlay:
  lines w5: 895,525 920,500 920,435 ; 895,760 1030,760 1040,750 1040,740 1040,690 ; 895,2260 920,2235 920,2170 ; 905,125 905,160 ; 905,1860 905,1895 ; 935,2500 935,2481.82 941.82,2475 1040,2475 1045,2470 1045,2415 ; 955,775 1040,775 1055,760 1055,709.61 1072.85,691.77 1092.62,691.77 ; 975,435 975,525 ; 975,2170 975,2260 ; 980,2500 1050,2500 1055,2495 1055,2420 1060,2415 1090,2415 ; 1050,795 1050,781.06 1085.53,745.53 ; 1050,2530 1050,2516.06 1085.53,2480.53 ; 1080.31,670.36 1080.31,690.14 ; 1090,2405 1090,2415 ; 1100,2415 1090,2415 ; 1105,125 1105,160 ; 1105,1860 1105,1895 ; 1305,125 1305,160 ; 1305,1860 1305,1895 ; 920,435 885,435 885,390 955,390 ; 920,435 955,435 ; 920,2170 885,2170 885,2125 955,2125 ; 920,2170 955,2170 ; 955,390 1030,390 1030,435 955,435 ; 955,390 955,435 ; 955,2125 1030,2125 1030,2170 955,2170 ; 955,2125 955,2170
  lines w50: 5,1760 3345,1760
  text "+" at 3150.91,3176.07 h59.06
  text "GND" at 775.91,1865.91 h19.68
  text "4.8V" at 970.91,1865.91 h19.68
  text "DIR/IN1" at 1145.91,1865.91 h19.68
  text "3.3V" at 870.91,1825.91 h19.68
  text "EN/IN2" at 1050.91,1825.91 h19.68
  text "SLP" at 1280.91,1825.91 h19.68
  text "Motor A Side" at 27.79,1813.71 h59.06
  text "Motor B Side" at 30.75,1645.75 h59.06
  text "+" at 3150.91,1451.07 h59.06
  text "Hatim Saad" at 60,1439.47 h19.68 r270
  text "Designed By:" at 102.46,1439.09 h19.68 r270
  text "JLCJLCJLCJLC" at 350.91,705.91 h31.5
  text "GND" at 775.91,130.91 h19.68
  text "4.8V" at 970.91,130.91 h19.68
  text "DIR/IN1" at 1145.91,130.91 h19.68
  text "3.3V" at 870.91,90.91 h19.68
  text "EN/IN2" at 1050.91,90.91 h19.68
  text "SLP" at 1280.91,90.91 h19.68
Board Shape:
  the board outline again, w10